# EAGLE board BusPirate-v4a (EAGLE 5.07)
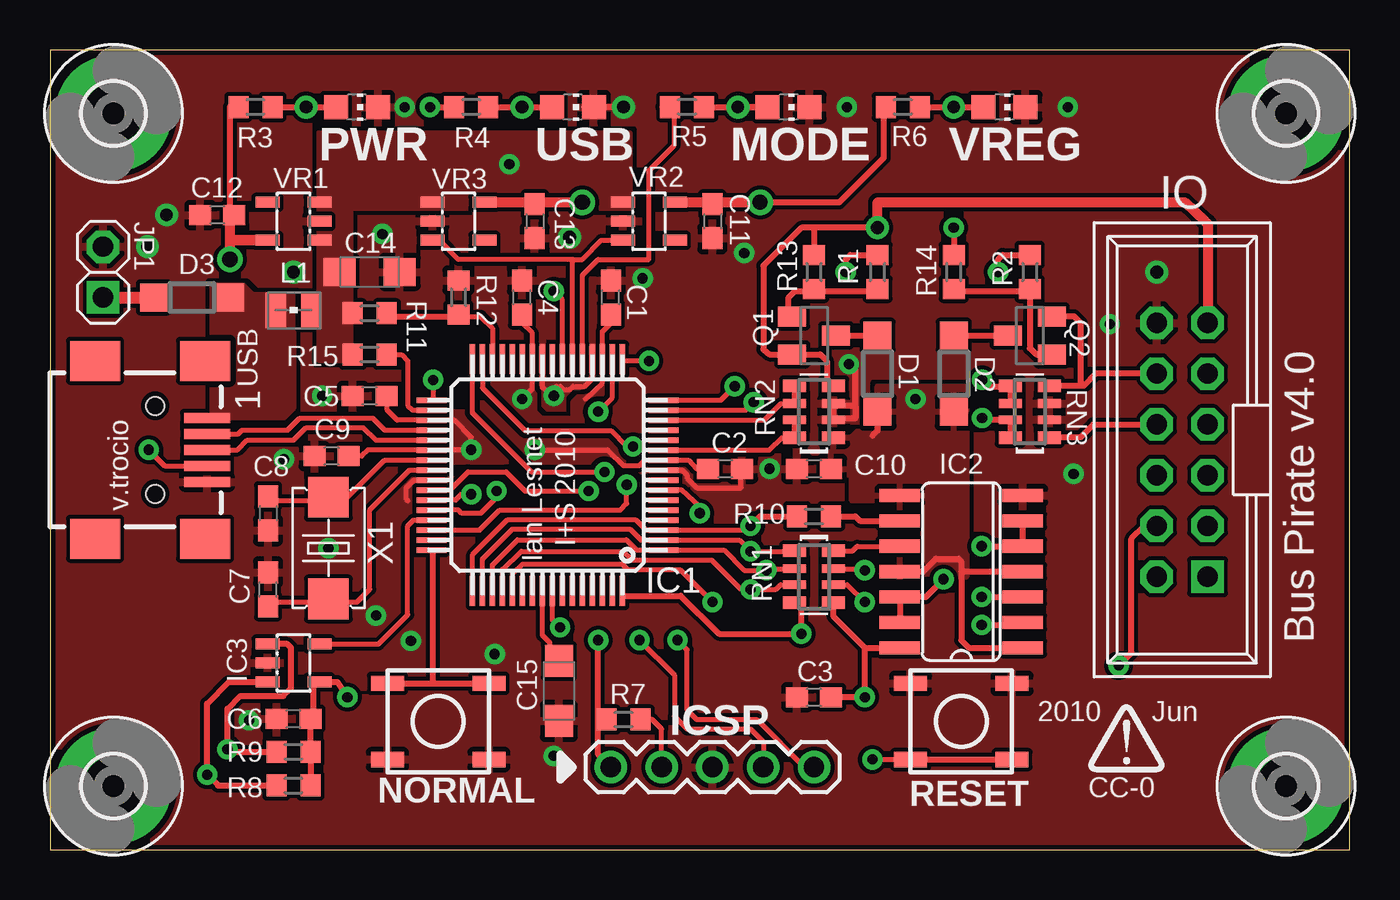
[diagram p0: board, top side]
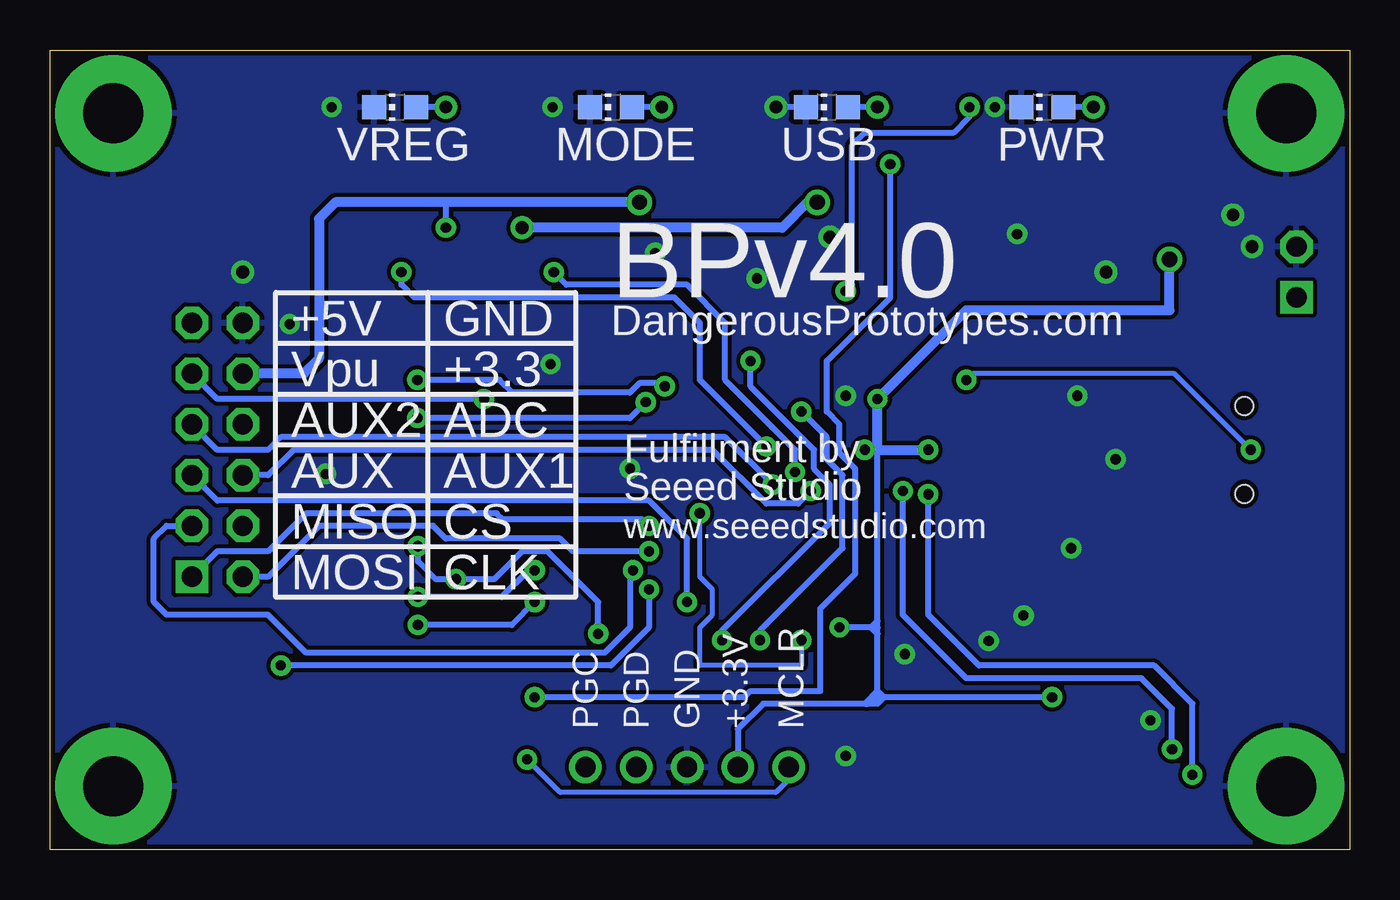
[diagram p1: board, bottom side, seen from below]

Size 65 x 40 mm. Coordinates in mm from the lower left corner, seen from the top.
Outline: 0,40 0,0 65,0 65,40 0,40
Copper layers (1*16): Top 0.035mm / dielectric 1.5mm / Bottom 0.035mm
Design rules "SparkFun": minimum track width 8mil, minimum drill 20mil, track to track 8mil, track to pad 8mil, pad to pad 8mil, via to via 8mil, smd to smd 8mil, copper to edge 10mil, drill to drill 8mil, minimum pad ring 12mil, minimum via ring 10mil, stop-mask expansion 4mil, vias tented up to drill 25mil, thermal gap 10mil

## Footprints (pad centres in the part's own frame; a part is rotated, then mirrored left to right if it is on the bottom)
C0603 = smd 1.1 x 1: 1 -0.85,0; 2 0.85,0
SMC_A = smd 1.6 x 1.4: + -1.5,0; - 1.5,0
SOD123 = smd 1.4 x 1.4: A 1.9,0; C -1.9,0
3,0-PAD = drill 3 pad 5.842 round: B3,0 0,0
TQFP64-10X10 = smd 1.5 x 0.28: 1 -5.8,3.75; 2 -5.8,3.25; 3 -5.8,2.75; 4 -5.8,2.25; 5 -5.8,1.75; 6 -5.8,1.25; 7 -5.8,0.75; 8 -5.8,0.25; 9 -5.8,-0.25; 10 -5.8,-0.75; 11 -5.8,-1.25; 12 -5.8,-1.75; 13 -5.8,-2.25; 14 -5.8,-2.75; 15 -5.8,-3.25; 16 -5.8,-3.75; 33 5.8,-3.75; 34 5.8,-3.25; 35 5.8,-2.75; 36 5.8,-2.25; 37 5.8,-1.75; 38 5.8,-1.25; 39 5.8,-0.75; 40 5.8,-0.25; 41 5.8,0.25; 42 5.8,0.75; 43 5.8,1.25; 44 5.8,1.75; 45 5.8,2.25; 46 5.8,2.75; 47 5.8,3.25; 48 5.8,3.75 | smd 0.28 x 1.5: 17 -3.75,-5.8; 18 -3.25,-5.8; 19 -2.75,-5.8; 20 -2.25,-5.8; 21 -1.75,-5.8; 22 -1.25,-5.8; 23 -0.75,-5.8; 24 -0.25,-5.8; 25 0.25,-5.8; 26 0.75,-5.8; 27 1.25,-5.8; 28 1.75,-5.8; 29 2.25,-5.8; 30 2.75,-5.8; 31 3.25,-5.8; 32 3.75,-5.8; 49 3.75,5.8; 50 3.25,5.8; 51 2.75,5.8; 52 2.25,5.8; 53 1.75,5.8; 54 1.25,5.8; 55 0.75,5.8; 56 0.25,5.8; 57 -0.25,5.8; 58 -0.75,5.8; 59 -1.25,5.8; 60 -1.75,5.8; 61 -2.25,5.8; 62 -2.75,5.8; 63 -3.25,5.8; 64 -3.75,5.8
SO14 = smd 0.66 x 2.032: 1 -3.81,-3.073; 2 -2.54,-3.073; 3 -1.27,-3.073; 4 0,-3.073; 5 1.27,-3.073; 6 2.54,-3.073; 7 3.81,-3.073; 8 3.81,3.073; 9 2.54,3.073; 10 1.27,3.073; 11 0,3.073; 12 -1.27,3.073; 13 -2.54,3.073; 14 -3.81,3.073
SOT-23-5 = smd 0.55 x 1.2: 1 -0.95,-1.3; 2 0,-1.3; 3 0.95,-1.3; 4 0.95,1.3; 5 -0.95,1.3
1X05 = drill 1.016 round: 1 0,0; 2 2.54,0; 3 5.08,0; 4 7.62,0; 5 10.16,0
PINSHRD_PTH_2X06 = drill 1.016 square: 1 -6.35,-1.27 | drill 1.016 octagon: 2 -6.35,1.27; 3 -3.81,-1.27; 4 -3.81,1.27; 5 -1.27,-1.27; 6 -1.27,1.27; 7 1.27,-1.27; 8 1.27,1.27; 9 3.81,-1.27; 10 3.81,1.27; 11 6.35,-1.27; 12 6.35,1.27
1X02-S = drill 1.016 square: 1 -1.27,0 | drill 1.016 octagon: 2 1.27,0
WE-KI_0805_B = smd 1.02 x 1.78: 1 -0.89,0; 2 0.89,0
CHIP-LED0805 = smd 1.2 x 1.2: A 0,-1.05; C 0,1.05
TACT_SWITCH_SMALL = smd 1.651 x 0.762: 1 -2.54,1.905; 2 2.54,1.905; 3 -2.54,-1.905; 4 2.54,-1.905
SOT23 = smd 1 x 1.4: 1 -0.95,-1.1; 2 0.95,-1.1; 3 0,1.1
R0603 = smd 1 x 1.1: 1 -0.85,0; 2 0.85,0
RN8P-4R-CRA06S = smd 0.63 x 1.15: 1 -1.295,-0.975; 4 1.295,-0.975; 5 1.295,0.975; 8 -1.295,0.975 | smd 0.44 x 1.15: 2 -0.4,-0.975; 3 0.4,-0.975; 6 0.4,0.975; 7 -0.4,0.975
CONN_USB_MINI-B = smd 2 x 2.5: BODY@1 -4.45,2.5; BODY@2 4.45,2.5; BODY@3 4.45,-3; BODY@4 -4.45,-3 | smd 0.5 x 2.3: D+ 0,2.6; D- -0.8,2.6; GND 1.6,2.6; ID 0.8,2.6; VUSB -1.6,2.6 | hole 0.9: -2.2,0; 2.2,0
4X6 = smd 2.032 x 2.032: 1 -2.54,0; 2 2.54,0

## Placement (x,y rotation side)
C1  0.1uF  [C0603]  28.05,27.62 90 top
C2  0.1uF  [C0603]  33.77,19.05 0 top
C3  0.1uF  [C0603]  38.22,7.62 180 top
C4  0.1uF  [C0603]  23.61,27.62 90 top
C5  0.1uF  [C0603]  15.99,22.7 180 top
C6  0.1uF  [C0603]  12.18,6.54 180 top
C7  0.1uF  [C0603]  10.91,13.02 90 top
C8  0.1uF  [C0603]  10.91,16.82 270 top
C9  0.1uF  [C0603]  14.09,19.68 180 top
C10  0.1uF  [C0603]  38.22,19.05 180 top
C11  1uF  [C0603]  33.13,31.43 270 top
C12  1uf  [C0603]  8.37,31.75 180 top
C13  1uF  [C0603]  24.25,31.43 270 top
C14  10uF  [SMC_A]  15.99,28.89 0 top
C15  10uF  [SMC_A]  25.45,7.93 270 top
D1  [SOD123]  41.39,23.81 90 top
D2  [SOD123]  45.2,23.81 90 top
D3  [SOD123]  7.1,27.62 180 top
H1  MOUNT-PAD-ROUND3.0  [3,0-PAD]  3.17,3.17 0 top
H2  MOUNT-PAD-ROUND3.0  [3,0-PAD]  61.83,3.17 0 top
H3  MOUNT-PAD-ROUND3.0  [3,0-PAD]  61.83,36.83 0 top
H4  MOUNT-PAD-ROUND3.0  [3,0-PAD]  3.17,36.83 0 top
IC1  PIC24FJ256GB106  [TQFP64-10X10]  24.88,18.73 180 top
IC2  4066D  [SO14]  45.58,13.9 90 top
IC3  24AASOT-23-5  [SOT-23-5]  12.18,9.33 270 top
ICSP  ICSP  [1X05]  28.05,4.12 0 top
IO  PINSHRD-PTH-2X06  [PINSHRD_PTH_2X06]  56.63,20 90 top
JP1  [1X02-S]  2.65,28.89 90 top
L1  700mA+ ferrite bead  [WE-KI_0805_B]  12.18,26.98 180 top
LED1  [CHIP-LED0805]  15.36,37.15 270 top
LED1A  [CHIP-LED0805]  15.36,37.15 90 bottom
LED2  [CHIP-LED0805]  36.95,37.15 270 top
LED2A  [CHIP-LED0805]  36.95,37.15 90 bottom
LED3  [CHIP-LED0805]  47.74,37.15 270 top
LED3A  [CHIP-LED0805]  47.74,37.15 90 bottom
LED4  [CHIP-LED0805]  26.15,37.15 270 top
LED4A  [CHIP-LED0805]  26.15,37.15 90 bottom
NORMAL  SMD_TACT_SMALL  [TACT_SWITCH_SMALL]  19.42,6.41 180 top
Q1  [SOT23]  38.22,25.71 270 top
Q2  [SOT23]  49.01,25.71 90 top
R1  1K  [R0603]  41.39,28.89 90 top
R2  1K  [R0603]  49.01,28.89 90 top
R3  1K1  [R0603]  10.28,37.15 180 top
R4  1K1  [R0603]  21.07,37.15 180 top
R5  1K1  [R0603]  31.86,37.15 180 top
R6  1K1  [R0603]  42.66,37.15 180 top
R7  2K  [R0603]  28.69,6.51 0 top
R8  2K  [R0603]  12.18,3.2 0 top
R9  2K  [R0603]  12.18,4.89 0 top
R10  2K  [R0603]  38.22,16.67 0 top
R11  10K  [R0603]  15.99,26.83 0 top
R12  10K  [R0603]  20.43,27.62 270 top
R13  10K  [R0603]  38.22,28.89 270 top
R14  10K  [R0603]  45.2,28.89 270 top
R15  100K  [R0603]  15.99,24.76 0 top
RESET  SMD_TACT_SMALL  [TACT_SWITCH_SMALL]  45.58,6.41 180 top
RN1  10k  [RN8P-4R-CRA06S]  38.22,13.65 270 top
RN2  10k  [RN8P-4R-CRA06S]  38.22,21.91 90 top
RN3  10k  [RN8P-4R-CRA06S]  49.01,21.91 90 top
U$1  [DP-LOGO]  51.93,3.87 0 top
USB  USB mini-b  [CONN_USB_MINI-B]  5.26,20 270 top
VR1  MIC5205-3.3BM5  [SOT-23-5]  12.18,31.43 90 top
VR2  MIC5205-3.3BM5  [SOT-23-5]  29.96,31.43 270 top
VR3  MIC5205-5.0BM5  [SOT-23-5]  20.43,31.43 270 top
X1  CRYSTAL_212M_  [4X6]  13.93,15.08 270 top

## Library data of the parts
C1-C15 R1-R3 R5-R10 R13-R15 = rcl
D1-D3 = diode
H1-H4 = holes
IC1 IO NORMAL RESET RN1-RN3 USB VR1-VR3 X1 = dp_devices
IC2 = 40xx
IC3 = dp_devices; 24AA: 24AA
ICSP = SparkFun
JP1 = pinhead-2
L1 = wuerth-elektronik
LED1 LED1A LED2 LED2A LED3 LED3A LED4 LED4A = led
Q1 Q2 = transistor-pnp
R4 R11 R12 = resistor
U$1 = DP-logo

## Nets
3V3: C1.1 C2.1 C4.1 C5.1 C6.1 C9.1 C12.1 IC1.10 IC1.19 IC1.26 IC1.35 IC1.38 IC1.57 IC3.4 ICSP.2 R3.2 R7.2 R8.2 R9.2 VR1.5
ADC: IO.8 RN3.1
ADC1: IC1.15 RN3.7 RN3.8
ADC2: IC1.11 RN2.7 RN2.8
ADC3: IC1.16 RN3.5 RN3.6
ADC4: IC1.14 RN2.5 RN2.6
ADC5: IC1.30 R11.2 R12.2
AUX0: IC1.53 IO.5
AUX1: IC1.42 IO.6
AUX2: IC1.46 IO.7
CLOCK: IC1.2 IC1.50 IO.2 RN1.1
CS: IC1.52 IO.4 RN1.3
EE_SCL: IC1.44 IC3.1 R9.1
EE_SDA: IC1.43 IC3.3 R8.1
EE_WP: IC1.45 IC3.5
EXVUSB: D3.C L1.2 USB.VUSB
GND: C1.2 C2.2 C3.2 C4.2 C5.2 C6.2 C7.2 C8.2 C9.2 C10.2 C11.2 C12.2 C13.2 C14.- C15.- H1.B3,0 H2.B3,0 H3.B3,0 H4.B3,0 IC1.9 IC1.20 IC1.25 IC1.41 IC2.7 IC3.2 ICSP.3 IO.12 JP1.2 LED1.C LED1A.C LED2.C LED2A.C LED3.C LED3A.C LED4.C LED4A.C NORMAL.1 NORMAL.2 R12.1 RESET.3 RESET.4 RN2.2 RN2.3 RN3.2 RN3.3 USB.GND VR1.2 VR2.2 VR3.2
LD1: IC1.21 R5.2
MCLR: IC1.7 ICSP.1 R7.1 RESET.1 RESET.2
MISO: IC1.1 IC1.51 IO.3 RN1.2
MOSI: IC1.3 IC1.49 IO.1 R10.1
MS0: IC1.48 NORMAL.3 NORMAL.4
N$1: IC2.9 R10.2
N$2: IC2.10 RN1.8
N$3: D1.A Q1.3
N$4: IC2.2 RN1.6
N$5: IC2.3 RN1.7
N$6: LED2.A LED2A.A R5.1
N$7: LED1.A LED1A.A R3.1
N$8: Q2.1 R2.1 R14.2
N$9: C7.1 IC1.40 X1.2
N$10: C15.+ IC1.56
N$11: IC1.34 R15.2
N$12: C8.1 IC1.39 X1.1
N$13: LED4.A LED4A.A R4.1
N$14: D2.A Q2.3
N$15: D3.A JP1.1
N$17: Q1.1 R1.1 R13.2
N$18: LED3.A LED3A.A R6.1
PGC: IC1.17 ICSP.5
PGD: IC1.18 ICSP.4
PULLUPEN: IC1.64 IC2.5 IC2.6 IC2.12 IC2.13 RN1.4
PUVSEL33: IC1.31 R2.2
PUVSEL50: IC1.32 R1.2
SWV33: C11.1 IO.10 Q2.2 R6.2 R14.1 RN3.4 VR2.5
SWV50: C13.1 IO.11 Q1.2 R13.1 RN2.4 VR3.5
USB_D+: IC1.37 USB.D+
USB_D-: IC1.36 USB.D-
USBID: IC1.33 USB.ID
USBLED: IC1.23 R4.2
VEXTERN: C10.1 D1.C D2.C IC2.1 IC2.4 IC2.8 IC2.11 IO.9 RN2.1
VREGEN: IC1.22 VR2.3 VR3.3
VUSB: C3.1 C14.+ IC2.14 L1.1 R11.1 R15.1 RN1.5 VR1.1 VR1.3 VR2.1 VR3.1

## Tracks (layer width: path | path; a pad name or v marks a point on that pad's centre or on a via)
3V3  (via drill 0.51, 0.76)
  Top 0.254: 16.78,22.54 C5.1 16.86,22.68 16.86,21.98 17.37,21.48 IC1.35 20.23,21.48 21.07,20.64 v21.07,20 | C1.1 28.05,26.35 27.63,25.93 IC1.19 27.63,23.34 26.79,22.54 | C4.1 23.61,26.35 24.13,25.83 IC1.26 24.13,23.06 v23.61,22.54 | C2.1 32.34,19.05 31.93,19.48 IC1.10 29.76,19.48 29.48,19.21 28.69,19.21 27.9,20 v24.25,20 | R7.2 30.12,6.51 30.59,6.03 ICSP.2 | C9.1 15.59,19.68 15.91,20 20.91,20 v21.07,20 | IC1.38 20.89,19.98 v21.07,20 | IC1.57 25.13,11.49 v25.52,11.11
  Top 0.305: 9.64,37.15 R3.2 9.01,37.15 9.01,31.75 | v14.88,7.62 14.37,8.38 IC3.4 13.2,8.35 13.2,6.79 13.03,6.63 C6.1 R9.2 | R9.2 | R9.2 R8.2
  Top 0.508: v9.01,29.52 9.01,29.84 9,30.48 VR1.5 9.29,30.48 9.01,30.48 9.01,31.75 C12.1
  Bottom 0.305: 23.61,11.11 23.61,11.43 | 23.61,11.43 23.61,20 | v14.88,7.62 23.29,7.62 | 23.29,7.62 23.61,7.62 | ICSP.2 30.59,6.03 29.32,7.3 24.25,7.3 | 23.61,7.3 23.93,7.3 | 23.93,7.3 24.09,7.3 | 23.61,11.11 23.93,11.11 | 23.93,11.11 v25.52,11.11 | 23.61,7.62 23.61,7.78 | 23.61,7.93 23.61,7.78 | 23.61,7.93 23.61,10.79 | 23.61,10.79 23.61,11.11 | 23.61,7.62 23.61,7.3 | 23.61,7.62 23.93,7.3 | 23.29,7.62 23.61,7.93 | 23.29,7.62 23.61,7.3 | 23.61,7.78 24.09,7.3 | 24.25,7.3 24.09,7.3 | 23.61,7.93 24.25,7.3 | 23.93,11.11 23.61,11.43 | 23.61,10.79 23.93,11.11
  Bottom 0.508: v9.01,29.52 9.01,26.98 19.16,26.98 v23.61,22.54 | 23.61,20 v23.61,22.54 | 23.61,20 v21.07,20 | v23.61,22.54 | 23.61,20 v24.25,20 | 23.61,20 v23.61,22.54
  pour Top (isolate 0.254, no thermals): 21.07,25.71 23.61,25.71 24.25,25.08 24.25,21.91 24.56,21.59 26.15,21.59 26.15,22.38 26.94,23.18 29.32,23.18 29.32,19.36 19.16,19.36 19.16,21.91 21.07,21.91
ADC
  Top 0.305: IO.8 52.19,21.27 51.55,20.64 50.28,20.64 50.26,20.61 RN3.1
ADC1  (via drill 0.51)
  Top 0.254: IC1.15 34.8,21.98 v35.2,22.38
  Top 0.305: RN3.8 RN3.7 46.71,21.5 v46.63,21.59
  Bottom 0.305: v46.63,21.59 35.99,21.59 v35.2,22.38 | v35.2,22.38
ADC2
  Top 0.254: IC1.11 35.97,19.98 36.6,20.61 RN2.8 RN2.7
ADC3  (via drill 0.51)
  Top 0.254: IC1.16 33.55,22.48 v34.25,23.18
  Top 0.305: 48.31,23.18 48.06,23.18 RN3.5 | RN3.5 RN3.6 | RN3.5 | RN3.5 47.76,23.2 47.74,23.18 46.95,23.18 v46.63,23.49
  Bottom 0.305: v34.25,23.18 | v34.25,23.18 34.41,23.33 35.52,23.33 35.99,22.86 41.87,22.86 42.5,23.49 v46.63,23.49
ADC4
  Top 0.254: RN2.5 RN2.6 36.55,22.3 35.73,21.48 IC1.14
ADC5
  Top 0.254: IC1.30 22.13,26.08 21.55,26.67 20.54,26.67 R12.2
  Top 0.305: R11.2 16.84,26.77 16.94,26.67 20.33,26.67 R12.2
AUX0  (via drill 0.51)
  Top 0.254: IC1.53 23.13,13.8 23.65,14.29 28.61,14.29 28.89,14.01 31.51,14.01 v33.13,12.38
  Bottom 0.305: v33.13,12.38 33.13,15.55 35.04,17.46 56.63,17.46 IO.5
AUX1  (via drill 0.51)
  Top 0.254: IC1.42 20,17.98 20.91,18.89 22.82,18.89 23.77,17.94 v26.94,17.94
  Bottom 0.305: IO.6 54.09,18.73 52.82,20 31.86,20 29.17,17.3 27.58,17.3 v26.94,17.94
AUX2  (via drill 0.51)
  Top 0.254: IC1.46 21.5,15.98 22.5,16.98 28.53,16.98 28.85,17.3 v28.85,18.25
  Bottom 0.305: IO.7 56.63,20 54.09,20 53.45,20.64 31.23,20.64 v28.85,18.25
CLOCK  (via drill 0.51)
  Top 0.254: IC1.50 21.63,14.53 23.13,16.03 29.01,16.03 29.56,15.48 IC1.2 34.48,15.48 v35.04,14.92 36.79,14.92 36.81,14.95 RN1.1 37.15,14.85 37.02,14.85 36.95,14.92
  Bottom 0.305: v35.04,14.92 38.85,14.92 39.48,15.55 45.2,15.55 45.84,16.19 51.55,16.19 54.09,13.65 IO.2
CS  (via drill 0.51)
  Top 0.254: IC1.52 22.63,14.02 23.57,14.92 28.69,14.92 29.13,14.48 33.09,14.48 34.56,13.02 v35.04,13.02 36.31,13.02 36.55,13.25 RN1.3
  Top 0.305: IO.4 54.73,16.19 54.09,15.55 54.09,9.84 v53.45,9.21
  Bottom 0.305: v53.45,9.21 36.95,9.21 35.52,10.63 | 35.52,10.63 | 35.52,10.63 35.04,11.11 v35.04,13.02
EE_SCL  (via drill 0.51)
  Top 0.254: IC1.44 20.44,16.98 20.59,16.82 21.55,16.82 22.34,17.62 v22.34,17.94
  Top 0.305: R9.1 9.01,4.89 v8.88,5.01 8.88,7.05 9.51,7.68 11.67,7.68 12.05,8.06 12.05,10.09 11.87,10.28 IC3.1
  Bottom 0.305: v8.88,5.01 8.88,7.05 10.4,8.57 19.16,8.57 22.34,11.74 v22.34,17.94
EE_SDA  (via drill 0.51)
  Top 0.254: IC1.43 20.3,17.48 20.59,17.78 v21.07,17.78
  Top 0.305: R8.1 8.4,3.2 v7.86,3.74 7.86,7.3 8.94,8.38 IC3.3
  Bottom 0.305: v7.86,3.74 7.86,7.3 9.77,9.21 18.53,9.21 21.07,11.74 v21.07,17.78
EE_WP
  Top 0.254: IC1.45 18.18,16.48 17.89,16.19 17.89,11.74 16.43,10.28 IC3.5
EXVUSB
  pour Top (isolate 0.305, no thermals): 8.12,23.18 9.39,23.18 9.39,25.71 8.12,25.71 8.12,28.25 9.64,28.25 10.12,27.78 12.18,27.78 12.18,22.06 11.7,21.59 8.12,21.59
GND  (via drill 0.51, 0.64)
  Top 0.254: IC1.25 24.63,23.11 v25.2,22.7 25.2,23.06 25.32,23.18 25.52,23.18 25.67,23.02 25.99,23.02 26.15,23.18 26.75,23.18 27.13,23.56 IC1.20 | IC1.41 18.2,18.48 17.82,18.09 17.82,17.54 17.89,17.46 | IC1.9 31.61,18.98 31.86,18.73 31.86,18.57 32.34,18.09 34.56,18.09 34.56,18.99 C2.2
  Top 0.305: v39.96,24.29 40.28,24.29 40.28,22.22 | 40.28,22.22 40.28,21.59 39.17,21.59 39.17,22.22 40.28,22.22 | v28.69,37.15 LED4A.C
  Top 0.406: LED4A.C 26.79,37.15
  Bottom 0.254: LED4A.C 27.1,37.15
  Bottom 0.305: LED4A.C v28.69,37.15
  other vias: 51.2,18.79 50.91,37.15 34.72,29.84 39.87,37.15 16.62,30.8 17.74,37.15 29.64,28.57 5.83,31.75 55.36,28.89 35.99,19.05 25.99,30.64 13.61,22.7 12.18,28.89 22.24,9.78 11.7,19.52 13.93,15.08 16.31,11.71 25.2,4.68 4.88,30.16 18.05,10.44 53.01,26.29 9.96,6.46
  pour Top (isolate 0.203, rank 2): 0,40 65,40 65,0 0,0
  pour Bottom (isolate 0.203, rank 2): 0,40 65,40 arc-3 65,0 0,0
LD1
  Top 0.254: IC1.21 26.63,28.73 27.42,29.52 29.96,29.52 29.96,33.97 31.23,35.24 31.23,36.8 R5.2 30.59,37.15
MCLR  (via drill 0.51)
  Top 0.254: IC1.7 31.59,17.98 32.5,17.14 v32.5,16.82 | R7.1 27.58,6.51 27.42,6.67 | v41.14,4.51 RESET.2
  Top 0.305: v27.42,10.47 27.42,6.67 27.42,4.76 ICSP.1 | RESET.2 RESET.1
  Bottom 0.254: v32.5,16.82 32.5,13.65 31.86,13.02 31.86,11.74 32.5,11.11 32.5,9.21 27.42,9.21 v27.42,10.47 | v41.14,4.51 39.48,2.85 28.69,2.85 28.05,3.49 ICSP.1
MISO  (via drill 0.51)
  Top 0.254: IC1.51 22.13,14.24 23.38,15.49 28.83,15.49 29.34,14.98 IC1.1 33.71,14.98 34.72,13.97 v35.83,13.97 35.92,14.05 RN1.2
  Bottom 0.305: IO.3 59.17,16.19 59.8,15.55 59.8,12.38 59.17,11.74 54.09,11.74 52.19,9.84 37.26,9.84 36.47,10.63 | 36.47,10.63 | 36.47,10.63 35.99,11.11 35.99,13.81 v35.83,13.97
MOSI  (via drill 0.51)
  Top 0.254: v35.04,16.19 34.83,15.98 IC1.3 29.81,15.98 29.29,16.51 22.9,16.51 21.15,14.76 21.15,12.97 21.13,12.92 IC1.49
  Top 0.305: R10.1 35.52,16.67 v35.04,16.19
  Bottom 0.305: IO.1 56.63,14.92 54.09,14.92 52.19,16.82 42.66,16.82 42.34,16.51 35.36,16.51 v35.04,16.19
MS0
  Top 0.254: 19.16,14.96 19.09,14.96 IC1.48
  Top 0.305: NORMAL.4 19.16,8.32 | 19.16,8.32 NORMAL.3 | 19.16,8.32 19.16,14.96
N$1
  Top 0.305: IC2.9 40.5,16.44 40.28,16.67 R10.2
N$2
  Top 0.254: IC2.10 40.37,15.17 40.15,14.95 RN1.8
N$3
  Top 0.305: Q1.3 D1.A
N$4  (via drill 0.51)
  Top 0.254: 48.53,11.24 IC2.2 | RN1.6 39.88,13.25 v40.76,12.38
  Top 0.305: v46.6,11.24 48.53,11.24
  Bottom 0.305: v46.6,11.24 41.9,11.24 v40.76,12.38
N$5  (via drill 0.51)
  Top 0.254: IC2.3 48.53,12.51 | RN1.7 40.67,14.05 v40.76,13.97
  Top 0.305: v46.6,12.63 IC2.3
  Bottom 0.305: v46.6,12.63 42.41,12.63 41.07,13.97 v40.76,13.97
N$6  (via drill 0.64)
  Top 0.305: v34.41,37.15 LED2A.A R5.1
  Top 0.406: R5.1 32.85,37.12
  Bottom 0.305: v34.41,37.15 LED2A.A
N$7  (via drill 0.64)
  Top 0.305: LED1A.A v12.81,37.15 R3.1
  Bottom 0.305: v12.81,37.15 LED1A.A
N$8
  Top 0.305: Q2.1 49.33,24.77 49.01,25.08 49.01,27.94 | 49.01,27.94 R2.1 | 49.01,27.94 45.3,27.94 R14.2
N$9
  Top 0.254: C7.1 11.12,12.38 13.45,12.38 13.61,12.54 X1.2 14.09,12.38 15.36,12.38 15.99,13.02 15.99,16.98 17.99,18.98 IC1.40
N$10
  Top 0.254: IC1.56 24.63,10.72 25.01,10.35 25.01,9.88 C15.+
N$11
  Top 0.254: IC1.34 18.14,21.98 17.89,22.22 17.89,24.45 17.58,24.76 R15.2
N$12
  Top 0.254: C8.1 10.91,17.46 | 10.91,17.46 | 10.91,17.46 13.77,17.46 X1.1 14.09,17.46 14.72,17.46 16.74,19.48 IC1.39
N$13  (via drill 0.64)
  Top 0.305: R4.1 v23.61,37.15 LED4A.A
  Bottom 0.305: v23.61,37.15 LED4A.A
N$14
  Top 0.305: Q2.3 D2.A
N$15
  Top 0.61: JP1.1 D3.A
N$17
  Top 0.305: R1.1 41.39,27.94 38.32,27.94 | 38.32,27.94 R13.2 | 38.32,27.94 37.26,27.94 36.95,27.62 36.95,26.84 Q1.1
N$18  (via drill 0.64)
  Top 0.305: LED3A.A v45.2,37.15 R6.1
  Top 0.406: LED3A.A 46.79,37.17
  Bottom 0.305: v45.2,37.15 LED3A.A
PGC  (via drill 0.51)
  Top 0.254: 28.69,24.45 28.68,24.43 | v29.96,24.45 28.69,24.45 | 37.74,4.12 35.36,6.51 32.34,6.51 31.86,6.98 31.86,10 v31.39,10.47 | 28.69,24.45 28.69,24.47 IC1.17
  Top 0.305: 37.74,4.12 ICSP.5
  Bottom 0.305: v29.96,24.45 29.96,23.18 26.79,20 26.79,19.05 25.99,18.25 25.99,16.35 31.39,10.95 v31.39,10.47
PGD  (via drill 0.51)
  Top 0.254: v27.42,21.91 28.13,22.61 IC1.18 | 35.67,4.28 35.67,5.39 35.04,6.03 31.86,6.03 31.23,6.67 31.23,8.73 v29.48,10.47
  Top 0.305: 35.67,4.28 ICSP.4
  Bottom 0.305: v27.42,21.91 26.15,20.64 26.15,19.52 25.36,18.73 25.36,15.08 29.48,10.95 v29.48,10.47
PULLUPEN  (via drill 0.51)
  Top 0.254: IC2.5 48.78,15.3 | 43.42,12.63 IC2.12 | IC1.64 28.63,12.76 28.69,12.7
  Top 0.305: IC2.12 IC2.13 | IC2.6 IC2.5 v46.6,15.17 | 43.42,12.63 43.8,12.63 v44.69,13.52 | 28.69,12.7 31.55,12.7 33.45,10.79 v37.58,10.79 | v37.58,10.79 37.59,10.8 | RN1.4 37.55,12.36 37.58,12.38 v37.58,10.79
  Bottom 0.305: v37.58,10.79 37.58,12.38 40.12,14.92 41.39,14.92 42.79,13.52 v44.69,13.52 45.71,13.52 46.6,14.41 v46.6,15.17
PUVSEL33  (via drill 0.51)
  Top 0.254: IC1.31 21.63,23.09 23.77,20.95 28.05,20.95 28.85,20.16 v29.17,20.16
  Top 0.305: R2.2 47.64,29.74 47.42,29.52 v47.42,28.89
  Bottom 0.305: v47.42,28.89 47.42,28.25 46.79,27.62 33.77,27.62 32.5,26.35 32.5,23.49 v29.17,20.16
PUVSEL50  (via drill 0.51)
  Top 0.254: IC1.32 21.13,21.84 24.09,18.89 v27.74,18.89
  Top 0.305: R1.2 40.02,29.74 39.8,29.52 v39.8,28.89
  Bottom 0.305: v27.74,18.89 27.74,20 31.23,23.49 31.23,26.35 33.13,28.25 39.17,28.25 v39.8,28.89
SWV33  (via drill 0.51, 0.76)
  Top 0.305: v35.52,32.38 39.48,32.38 41.71,34.6 41.71,37.04 R6.2 | v45.2,31.11 R14.1 | 51.7,23.2 RN3.4 | 51.7,23.2 52.31,23.81 IO.10 | Q2.2 51.23,26.66 51.55,26.35 51.55,23.35 51.7,23.2
  Top 0.406: R6.2 41.71,37.15
  Top 0.508: 33.77,32.38 VR2.5 | 33.77,32.38 C11.1 | 33.77,32.38 v35.52,32.38
  Bottom 0.305: 45.2,32.38 v45.2,31.11
  Bottom 0.508: v35.52,32.38 45.2,32.38 50.72,32.38 51.55,31.56 51.55,24.57 52.31,23.81 IO.10
SWV50  (via drill 0.64, 0.76)
  Top 0.305: v41.39,31.11 38.22,31.11 | 38.22,31.11 37.58,31.11 35.67,29.21 35.67,25.02 35.99,24.77 Q1.2 38.53,24.77 38.85,24.45 38.85,23.18 39.16,23.18 RN2.4 39.3,23.2 39.33,23.18 | 38.22,31.11 R13.1
  Top 0.508: VR3.5 24.14,32.38 C13.1 24.35,32.38 v26.63,32.38 | v41.39,31.11 41.39,32.38 56.76,32.38 57.77,31.43 57.9,31.3 IO.11
  Bottom 0.508: v41.39,31.11 28.37,31.11 27.1,32.38 v26.63,32.38
USB_D+
  Top 0.254: USB.D+ 9.39,20 9.87,20.48 12.18,20.48 12.81,21.11 15.67,21.11 16.3,20.48 IC1.37
USB_D-
  Top 0.254: USB.D- 9.42,20.8 9.6,20.98 11.89,20.98 12.5,21.59 16.15,21.59 16.74,20.99 16.76,20.98 IC1.36
USBID  (via drill 0.51)
  Top 0.254: USB.ID 5.74,19.2 v4.94,20 | v19.16,23.49 19.16,22.57 IC1.33
  Bottom 0.254: v4.94,20 8.75,23.81 18.85,23.81 v19.16,23.49
USBLED  (via drill 0.51)
  Top 0.254: IC1.23 25.63,27.5 v25.2,27.94
  Top 0.305: v19.01,37.15 R4.2
  Bottom 0.254: v25.2,27.94 24.88,28.25
  Bottom 0.305: 24.88,28.25 24.88,35.24 24.25,35.88 19.8,35.88 19.01,36.67 v19.01,37.15
VEXTERN  (via drill 0.51)
  Top 0.254: IC2.8 42.53,17.74
  Top 0.305: IC2.1 45.96,10.09 45.58,10.47 45.58,13.9 | 45.58,13.9 45.58,14.41 45.45,14.54 44.31,14.54 43.68,13.9 IC2.11 | 45.58,13.9 IC2.4 | D2.C | D1.C 41.39,20.95 41.14,20.7 | 42.91,17.87 42.66,17.87 IC2.8
  Bottom 0.305: IO.9 56.63,22.54 v43.3,22.54
  pour Top: 38.85,20.64 40.12,20.64 41.39,21.91 41.39,23.18 45.84,23.18 45.84,13.65 41.39,13.65 41.39,17.46 40.12,17.46 40.12,18.73 38.85,18.73
VREGEN
  Top 0.254: VR3.3 19.48,30.48 20.43,29.52 26.15,29.52 | 26.15,29.52 26.63,29.52 27.58,30.48 VR2.3 | IC1.22 26.13,29.5 26.15,29.52
VUSB  (via drill 0.51)
  Top 0.254: 42.41,10.09 IC2.14
  Top 0.305: 42.45,10.03 IC2.14 42.28,10.09 | C3.1 v40.76,7.62 40.76,10.09 | 40.76,10.09 42.02,10.09 | 38.84,12.39 38.85,12.38 39.16,12.38 RN1.5 39.19,11.66 40.76,10.09
  Top 0.406: IC2.14 42.51,10.22 | 42.02,10.09 42.41,10.09
  Top 0.508: 42.41,10.09 42.28,10.09
  Bottom 0.305: v22.98,34.29 22.98,27.62 26.15,24.45 26.15,21.91 25.52,21.27 25.52,19.84 24.72,19.05 24.72,13.81 26.47,12.06 26.47,7.93 29.96,7.93 30.28,7.62 v40.76,7.62
  pour Top (no thermals): 13.45,35.88 29.01,35.88 29.01,32.06 15.04,32.06 15.04,24.45 13.45,24.45 13.45,30.95 14.09,30.95 14.09,31.91 13.45,31.91

## Text on the board
tPlace: v.trocio | I+S 2010 | Ian Lesnet | 2010 | Jun | CC-0
tNames: PWR | USB | MODE | VREG | Bus Pirate v4.0
bNames: PWR | USB | MODE | VREG | BPv4.0 | DangerousPrototypes.com | GND | +5V | +3.3 | Vpu | ADC | AUX2 | Fulfillment by | AUX1 | AUX | Seeed Studio | www.seeedstudio.com | CS | MISO | CLK | MOSI | MCLR | +3.3V | GND | PGD | PGC
tValues: vimark
Reference: I/O header | EXT PWR | USB-OTG | GND | +5v | V+ - GND | +3v | Vpu | ADC | AUX2 | USB | AUX1 | AUX | CS | MISO | CLK | MOSI | MCLR | +3.3V | GND | DATA | CLOCK | BUS PIRATE V4.0 | CC-0 | Ian Lesnet 2010 | Programming Header | http://dangerousprototypes.com